# EAGLE board PCB layout (EAGLE 9.6.2)
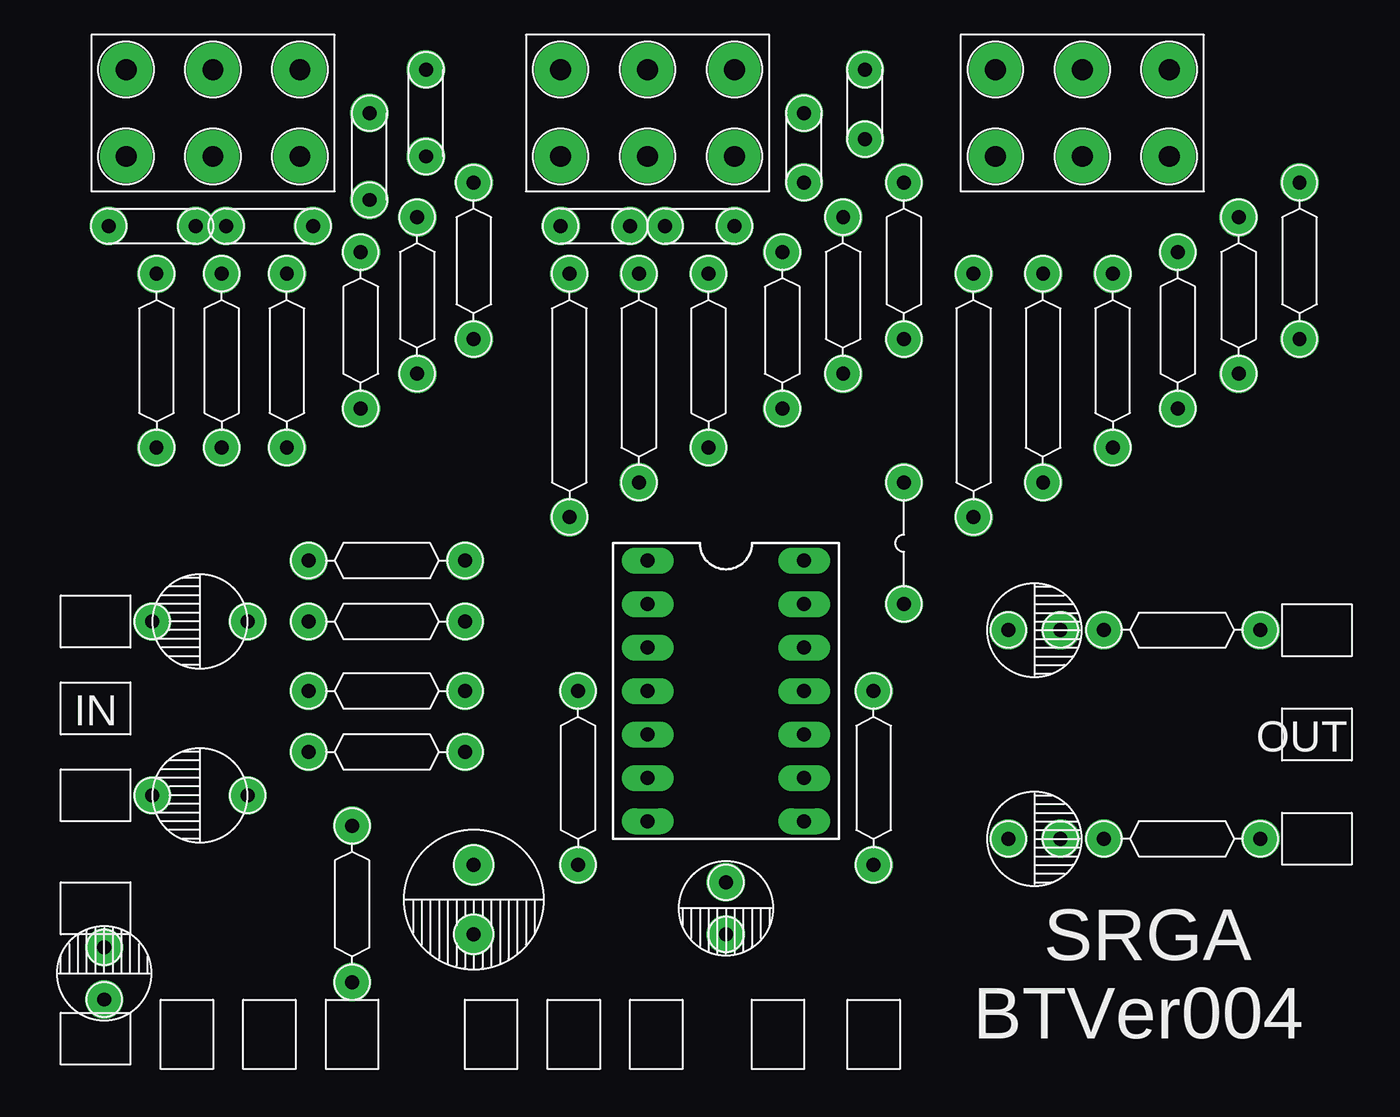
[diagram p0: board, top side]
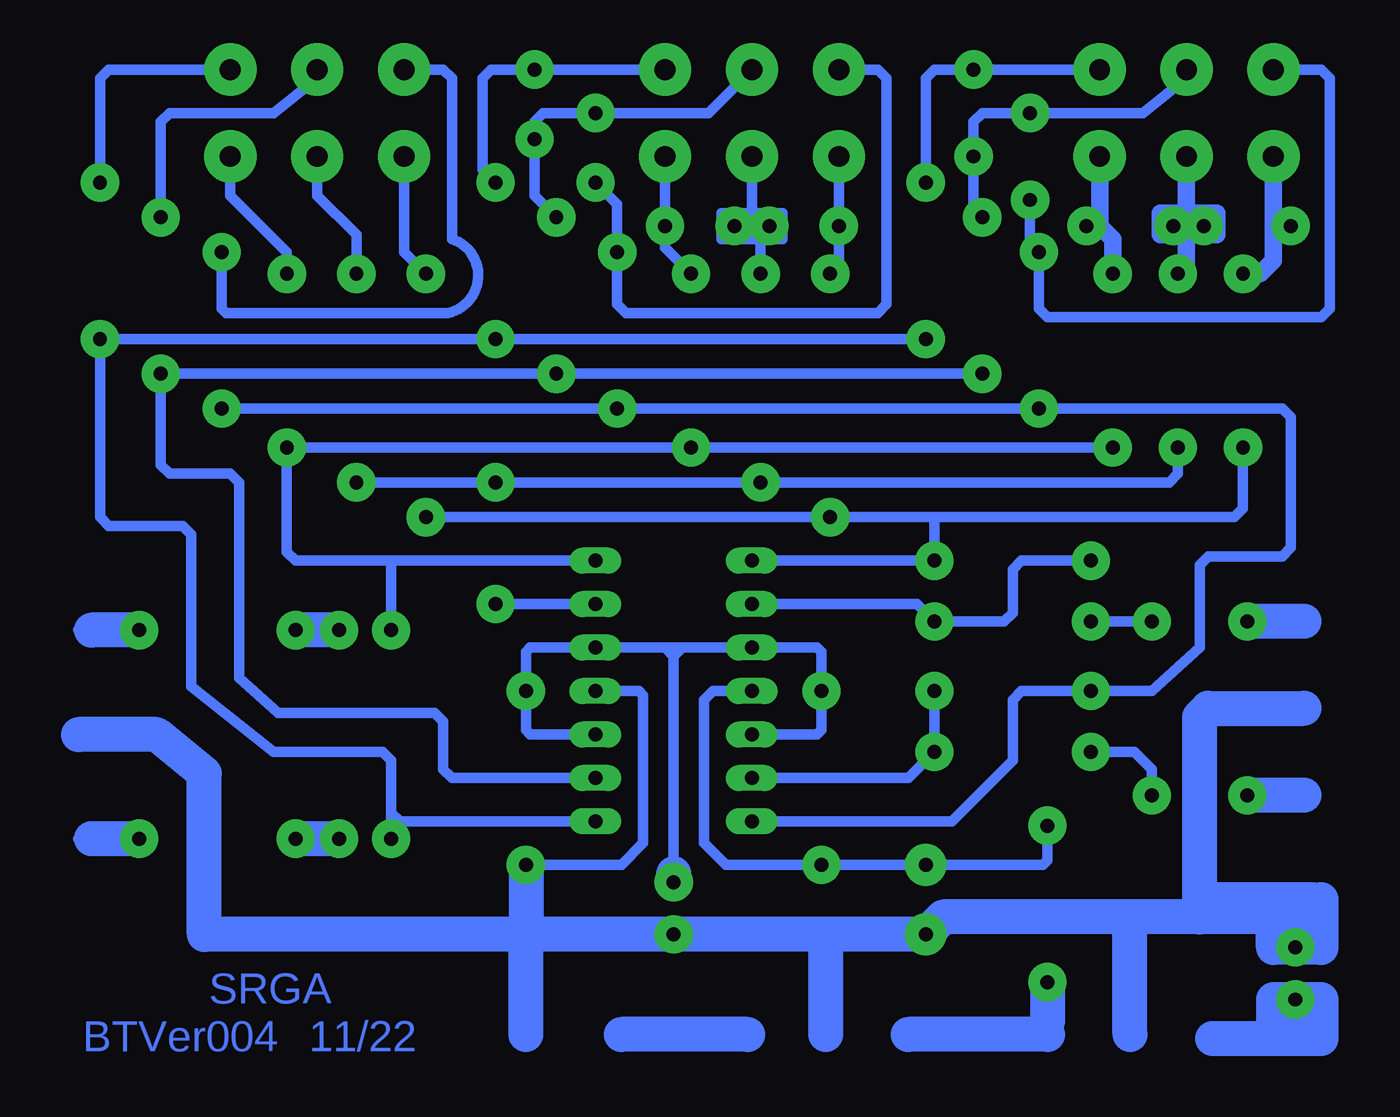
[diagram p1: board, bottom side, seen from below]

No outline drawn. Coordinates in mm, seen from the top.
Copper layers (1*16): Top 0.035mm / dielectric 1.5mm / Bottom 0.035mm
Design rules "default": minimum track width 10mil, minimum drill 24mil, track to track 8mil, track to pad 8mil, pad to pad 8mil, via to via 8mil, smd to smd 8mil, copper to edge 40mil, drill to drill 8mil, minimum pad ring 10mil, minimum via ring 8mil, stop-mask expansion 4mil, vias tented up to drill 0mil, thermal gap 10mil

## Footprints (pad centres in the part's own frame; a part is rotated, then mirrored left to right if it is on the bottom)
4.7MF/63V_3MM = drill 0.8 pad 2.2: P$1 -1.5,0; P$2 1.5,0
1/4R9MM = drill 0.8 pad 2.2: P$1 -4.5,0; P$2 4.5,0
R1 = drill 0.8 pad 2: P$1 5,0; P$2 -5,0
473 = drill 0.8 pad 2.2: P$1 -2.5,0; P$2 2.5,0
472 = drill 0.8 pad 2.2: P$1 -2,0; P$2 2,0
1/4R14MM = drill 0.8 pad 2.2: P$1 -7,0; P$2 7,0
1/4R10MM = drill 0.8 pad 2.2: P$1 5,0; P$2 -5,0
C5 = drill 0.8 pad 2.4: P$1 -2,0; P$2 2,0
4.7MF/63V_8MM = drill 0.8 pad 2.2: P$1 -1.5,0; P$2 1.5,0
14PIN-IC = drill 0.8 pad 1.5 long: P$1 0,-4.5; P$2 0,4.5; P$3 2.5,-4.5; P$4 5,-4.5; P$5 7.5,-4.5; P$6 -2.5,-4.5; P$7 -5,-4.5; P$8 -7.5,-4.5; P$9 -2.5,4.5; P$10 -5,4.5; P$11 -7.5,4.5; P$12 2.5,4.5; P$13 5,4.5; P$14 7.5,4.5
1/4R12MM = drill 0.8 pad 2.2: P$1 -6,0; P$2 6,0
CONTROL = drill 1.2 pad 3: P$1 -5,2.5; P$2 0,2.5; P$3 5,2.5; P$4 0,-2.5; P$5 5,-2.5; P$6 -5,-2.5
4.7MF/63V5.5MM = drill 0.8 pad 2.2: P$1 -2.75,0; P$2 2.75,0
JUMBER = drill 0.8 pad 2.2: P$1 -3.5,0; P$2 3.5,0

## Placement (x,y rotation side)
E$1  [4.7MF/63V_3MM]  56.5,25.5 0 top
E$2  [PAD3]  2.5,26 0 top
E$3  [PAD3]  2.5,21 0 top
E$4  [1/4R9MM]  65,13.5 180 top
E$5  [R1]  6,41 90 top
E$6  [PAD3]  2.5,16 0 top
E$7  [473]  5.75,48.75 0 top
E$8  [472]  43.25,53.25 90 top
E$9  [1/4R14MM]  29.75,39 90 top
E$10  [1/4R14MM]  53,39 90 top
E$11  [1/4R10MM]  47.25,17 90 top
E$12  [4.7MF/63V_3MM]  38.75,9.5 270 top
E$13  [1/4R9MM]  19.25,26 0 top
E$14  [472]  37.25,48.75 0 top
E$15  [PAD3]  7.75,2.25 90 top
E$16  [473]  18.25,52.75 90 top
E$17  [472]  46.75,55.75 90 top
E$18  [R1]  13.5,41 90 top
E$19  [1/4R9MM]  19.25,22 0 top
E$20  [C5]  24.25,10 270 top
E$21  [PAD3]  12.5,2.25 90 top
E$22  [4.7MF/63V_8MM]  3,5.75 90 top
E$23  [1/4R9MM]  17.75,42.75 90 top
E$24  [1/4R10MM]  30.25,17 90 top
E$25  [PAD3]  17.25,2.25 90 top
E$26  [PAD3]  25.25,2.25 90 top
E$27  [PAD3]  30,2.25 90 top
E$28  [PAD3]  34.75,2.25 90 top
E$29  [4.7MF/63V_3MM]  56.5,13.5 0 top
E$30  [1/4R9MM]  21,44.75 90 top
E$31  [1/4R9MM]  17.25,9.75 90 top
E$32  [14PIN-IC]  38.75,22 270 top
E$33  [1/4R12MM]  33.75,40 90 top
E$34  [1/4R12MM]  57,40 90 top
E$35  [1/4R10MM]  37.75,41 90 top
E$36  [1/4R9MM]  64.75,42.75 90 top
E$37  [1/4R9MM]  68.25,44.75 90 top
E$38  [1/4R9MM]  71.75,46.75 90 top
E$39  [R1]  9.75,41 90 top
E$40  [CONTROL]  59.25,55.25 0 top
E$41  [4.7MF/63V5.5MM]  8.5,16 180 top
E$42  [1/4R9MM]  65,25.5 180 top
E$43  [PAD3]  72.75,25.5 0 top
E$45  [CONTROL]  34.25,55.25 0 top
E$46  [CONTROL]  9.25,55.25 0 top
E$47  [PAD3]  72.75,19.5 0 top
E$49  [4.7MF/63V5.5MM]  8.5,26 180 top
E$50  [PAD3]  41.75,2.25 90 top
E$51  [1/4R10MM]  61,41 90 top
E$52  [PAD3]  47.25,2.25 90 top
E$53  [1/4R9MM]  24.25,46.75 90 top
E$54  [1/4R9MM]  19.25,18.5 0 top
E$58  [1/4R9MM]  19.25,29.5 0 top
E$60  [1/4R9MM]  49,46.75 90 top
E$61  [472]  31.25,48.75 0 top
E$62  [PAD3]  2.5,9.5 0 top
E$63  [1/4R10MM]  6,41 90 top
E$64  [1/4R10MM]  9.75,41 90 top
E$65  [1/4R9MM]  45.5,44.75 90 top
E$66  [1/4R9MM]  42,42.75 90 top
E$67  [1/4R10MM]  13.5,41 90 top
E$68  [PAD3]  2.5,2 0 top
E$69  [473]  12.5,48.75 0 top
E$70  [JUMBER]  49,30.5 90 top
E$71  [473]  21.5,55.25 90 top
E$105  [PAD3]  72.75,13.5 0 top

## Library data of the parts
E$1 E$4 E$5 E$7-E$14 E$16-E$19 E$22-E$24 E$29-E$31 E$33-E$42 E$45 E$46 E$49 E$51 E$53 E$54 E$58 E$60 E$61 E$63-E$67 E$69-E$71 = 1Btver004
E$2 E$3 E$6 E$15 E$21 E$25-E$28 E$43 E$47 E$50 E$52 E$62 E$68 E$105 = 1Pad
E$20 = 2 Cap-Round
E$32 = 1Ic

## Nets
S$1: E$19.P$2 E$32.P$4 E$54.P$2
S$2: E$16.P$1
S$3: E$1.P$1
S$5: E$11.P$2
S$6: E$20.P$2 E$22.P$2
S$8: E$19.P$1
S$9: E$12.P$1 E$32.P$3 E$32.P$6 E$32.P$9 E$32.P$12
S$11: E$32.P$8 E$58.P$2
S$12: E$31.P$2
S$13: E$29.P$1 E$32.P$14
S$15: E$1.P$2 E$42.P$2
S$16: E$4.P$2 E$29.P$2
S$17: E$42.P$1
S$20: E$10.P$2
S$23: E$31.P$1
S$28: E$39.P$1
S$31: E$54.P$1
S$32: E$36.P$1
S$33: E$4.P$1
S$35: E$34.P$2
S$39: E$51.P$1
S$41: E$5.P$1 E$7.P$1
S$48: E$13.P$2 E$32.P$7 E$58.P$1
S$54: E$18.P$1 E$69.P$2
S$55: E$35.P$1
S$65: E$13.P$1
S$77: E$69.P$1

## Tracks (layer width: path | path; a pad name or v marks a point on that pad's centre or on a via)
S$1
  Bottom 0.6: E$32.P$4 25.25,17 E$54.P$2 E$19.P$2
S$2
  Bottom 0.6: E$16.P$1 18.25,47.75 17.75,47.25 17.75,44 17.25,43.5 1.5,43.5 1,44 1,57.25 1.5,57.75 4.25,57.75
S$3
  Bottom 0.6: 55,29.5 43.25,29.5 | 55,29.5 E$1.P$1 | 13,36 61,36 61,30 60.5,29.5 55,29.5
S$4
  Bottom 0.6: 43.25,27 49,27
S$5
  Bottom 0.6: 43.25,22 40.75,22 40.5,21.75 40.5,13.25 41.75,12 E$11.P$2
  Bottom 2: E$11.P$2 47.25,7.25
S$6
  Bottom 2: 73,19.5 68.5,19.5 65.75,17.25 65.75,8 E$20.P$2 23.25,9 8.5,9 | 1.5,10 1.5,7.25 E$22.P$2 4.25,7.25 4.25,9 | 2.5,21 8,21 8.5,20.5 8.5,9 | 4.25,9 2,9 2,10 7.5,10 | 4.25,9 8.5,9
S$7
  Bottom 0.6: 24.25,51.25 24.25,57.25 23.75,57.75 14.25,57.75
S$8
  Bottom 0.6: 16.75,38.25 3.75,38.25 3.25,37.75 3.25,30.25 3.75,29.75 8,29.75 8.5,29.25 8.5,24.5 11.25,22 E$19.P$1 18.75,22 19.25,21.5 19.25,18 22.75,14.5 34.25,14.5
S$9
  Bottom 0.6: E$32.P$12 47,19.5 47.25,19.75 47.25,24.25 47,24.5 E$32.P$9 39.25,24.5 | 38.75,11.25 38.75,11.5 38.75,24 | 38.75,24 38.75,24.25 39,24.5 | 38.75,24 39.25,24.5 | 39,24.5 39.25,24.5 | 38.25,24.5 39,24.5 | 38.25,24.5 38.75,24 | 38.25,24.5 E$32.P$6 30.5,24.5 30.25,24.25 30.25,19.75 30.5,19.5 E$32.P$3
  Bottom 2: 38.75,11.5 E$12.P$1
S$10
  Bottom 2: 2.5,26 5.75,26
S$11
  Bottom 0.6: E$32.P$8 E$58.P$2 23.75,32 | 6,36 6,32.5 6.5,32 23.75,32 | 23.75,32 53,32
S$12
  Bottom 0.6: 34,22 36.5,22 37,21.5 37,13.25 35.75,12 17.5,12 17.25,12.25 E$31.P$2
S$13
  Bottom 0.6: 55,14.5 55,15 | 55,14.5 E$29.P$1 | 24.25,42.25 71.75,42.25 71.75,32 71.25,31.5 67,31.5 66.5,31 66.5,22.25 61.75,18.5 55.5,18.5 55,18 55,15 | 54.5,14.5 55,14.5 | E$32.P$14 54.5,14.5 | 54.5,14.5 55,15
S$14
  Bottom 0.6: 20.75,40.25 68.25,40.25 68.25,35 67.75,34.5 64.25,34.5 63.75,34 63.75,22.75 61.5,20.75 52.5,20.75 52,20.25 52,17.5 51.5,17 43.25,17
S$15
  Bottom 2: E$1.P$2 E$42.P$2
S$16
  Bottom 2: E$29.P$2 E$4.P$2
S$17
  Bottom 0.6: 72.25,25.5 73,25.5
  Bottom 2: E$42.P$1 72.25,25.5
S$18
  Bottom 2: 4.25,2 1.5,2 1.5,4.25 4.25,4.25 4.25,2 | 4.25,2 7.75,2
S$19
  Bottom 0.6: 29.25,52.75 29.25,46.75 29.75,46
S$20
  Bottom 0.6: 54.25,52.75 54.25,47.25 E$10.P$2
S$21
  Bottom 0.6: 32.5,48.5 32.5,49.5 36,49.5 36,48 32.5,48 32.5,48.5 | 32.5,48.5 35.5,48.5 35.5,49 34.25,49 | 32.75,49 34.25,49 | 34.25,49 34.25,53
S$22
  Bottom 2: 12.5,2.25 12.5,8.75
S$23
  Bottom 2: E$31.P$1 17.25,3
S$24
  Bottom 2: 17.25,2.25 25.25,2.25
S$25
  Bottom 0.6: 34.25,57.75 36.75,55.25 46.25,55.25 46.75,54.75 46.75,50.5 45.5,49.25
S$26
  Bottom 2: 30,2.25 30,7.5
S$27
  Bottom 2: 34.5,2.25 41.75,2.25
S$28
  Bottom 0.6: 9.25,46.5 9.25,52.75
  Bottom 1: 9.25,53 9.25,46.5 E$39.P$1
S$29
  Bottom 2: 47.25,2.25 47.25,7.75
S$30
  Bottom 0.6: 49,51.25 49.75,52 49.75,57.25 49.25,57.75 39.25,57.75
S$31
  Bottom 0.6: 11.25,16 11.25,17.5 12.25,18.5 E$54.P$1
S$32
  Bottom 0.6: 17.5,38.25 E$36.P$1
S$33
  Bottom 0.6: 72.25,13.5 73,13.5
  Bottom 2: E$4.P$1 72.25,13.5
S$35
  Bottom 0.6: 57,46.5 E$34.P$2 57,48.25 59.25,50.5 59.25,52.75
S$36
  Bottom 0.6: 9.25,57.75 9.25,57.25 11.75,55.25 21,55.25 21.5,54.75 21.5,50 21,49.25
S$37
  Bottom 0.6: 64.25,50.75 64.25,52.75
S$38
  Bottom 2: 1.75,2 1.75,4.25 3.5,4.25 3.5,2.75
S$39
  Bottom 0.6: 64.25,52.75 64.25,50.5 61,47.25 E$51.P$1
S$41
  Bottom 0.6: 4.25,48.75 4.25,46.5 4.75,46 5,46 | 4.25,49.5 4.25,52.75
  Bottom 1: 4.25,53 4.25,49.5 4.25,48.75 | 4.25,48.75 E$7.P$1 | 4.25,48.75 4.25,46.75 5,46 E$5.P$1
S$42
  Bottom 0.6: 59.25,57.75 59.25,57.25 61.75,55.25 67.75,55.25 68.25,54.75 68.25,49.25
S$43
  Bottom 0.6: 9.75,36 9.75,34.5 10.25,34 57,34
S$46
  Bottom 0.6: 33.75,46 33.75,48.25
S$48
  Bottom 0.6: E$32.P$7 24.75,27 E$13.P$2 19.75,26 19.25,26.5 19.25,29 18.75,29.5 E$58.P$1
S$54
  Bottom 0.6: 14.25,48.75 14.25,52.75
  Bottom 1: 14.25,52.75 14.25,49 E$69.P$2 14.25,48.75 13.5,48 E$18.P$1
S$55
  Bottom 0.6: 39.25,52.75 39.25,47.5 E$35.P$1
S$56
  Bottom 0.6: 28.5,57.75 29.25,57.75 27,57.75 26.5,57.25 26.5,44.25 27,43.75 41.5,43.75 42,44.25 42,50 43.25,51.25
S$60
  Bottom 2: 2.5,16 5.75,16
S$61
  Bottom 0.6: 64.75,47.25 64.75,44 64.5,43.75 51.75,43.75 arc-150 51.5,48 51.5,57.25 52,57.75 54.25,57.75 53.75,57.75
S$65
  Bottom 0.6: 11.25,26 E$13.P$1
S$77
  Bottom 1: 7.5,48.75 E$69.P$1
S$78
  Bottom 1: 7.5,49.5 10.75,49.5 10.75,48.25 7.5,48.25 7.5,49.5
S$97
  Bottom 0.6: 64.25,57.75 71.25,57.75 71.75,57.25 71.75,51.25

## Text on the board
Bottom: SRGA | 11/22 | BTVer004
tPlace: IN | OUT | SRGA | BTVer004